# Altium PCB Glucometer-I.C.- RF Module V2.PcbDoc
Units mm, origin at the board's own origin, x right, y up, seen from the top; angles counter-clockwise.
Board outline 23.33 x 19.55 mm, 2 copper layers (Top Layer, Bottom Layer); 2 components, 14 nets, 21 pads, 0 vias.
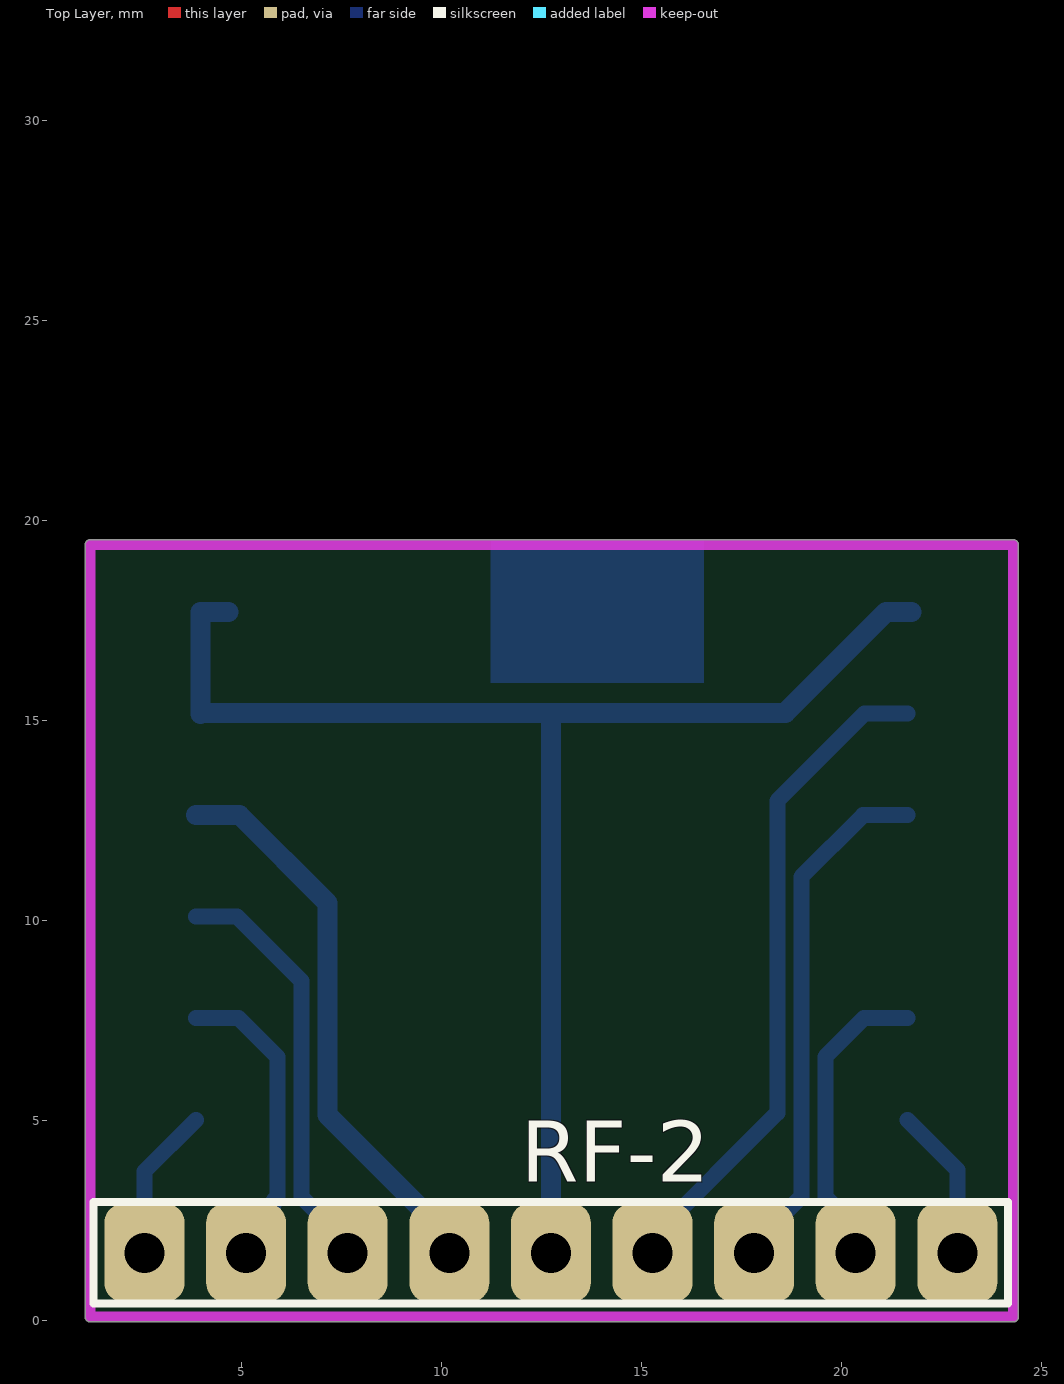
[diagram p0: Top Layer view]
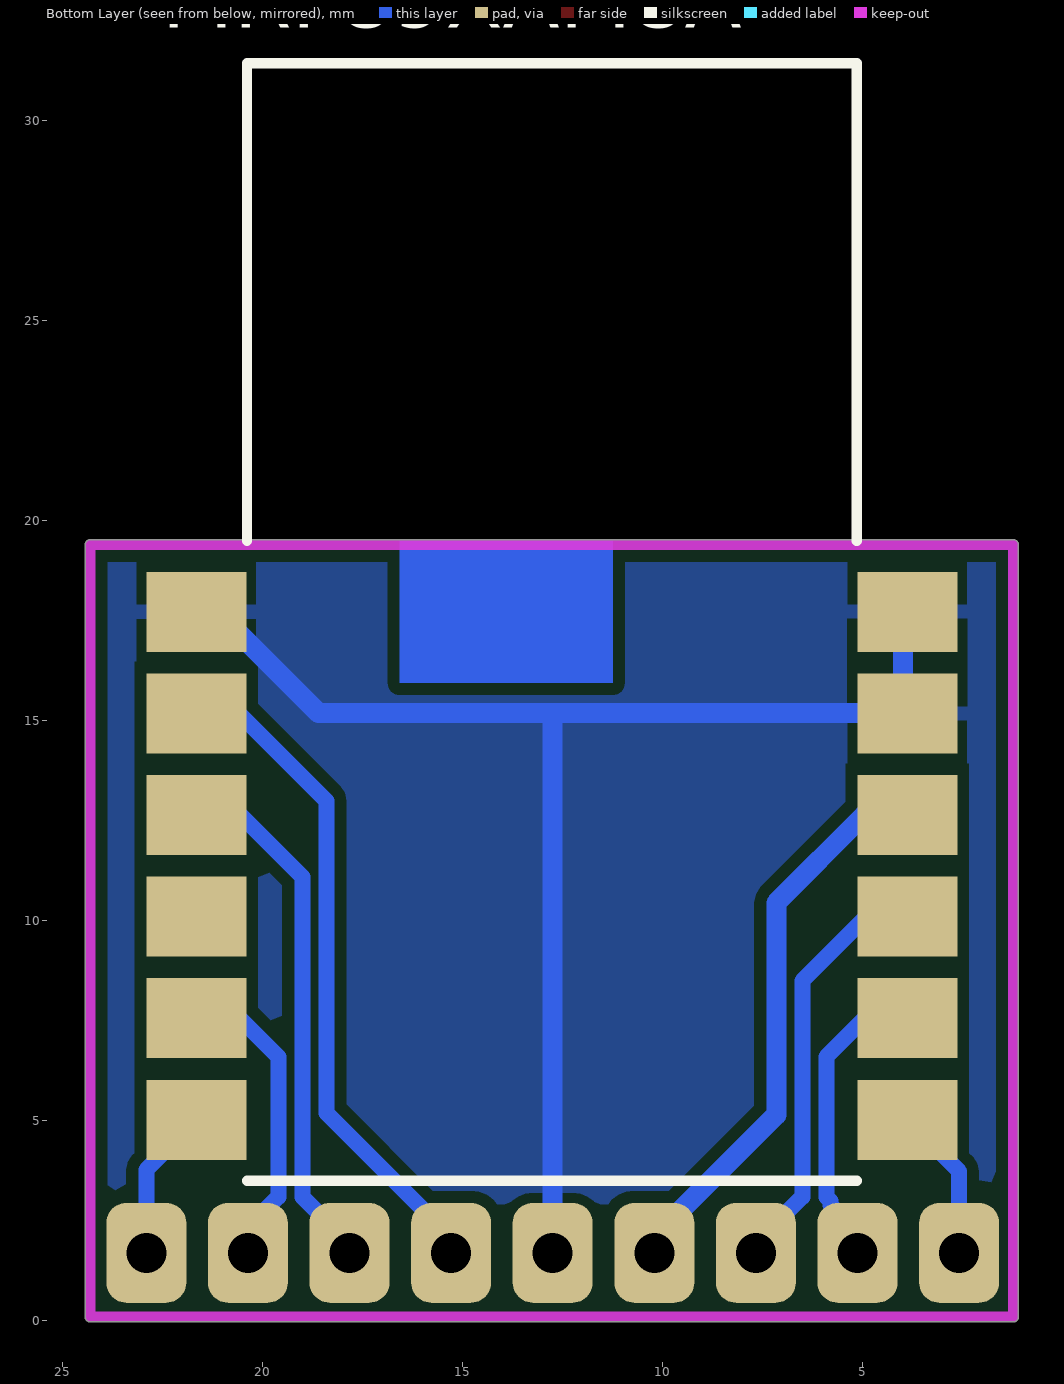
[diagram p1: Bottom Layer view, seen from below]

## Layer stack, top to bottom
Top Layer: signal copper 0.0356
Dielectric: dielectric 0.32, FR-4, Dk 4.8
Bottom Layer: signal copper 0.0356

## Board outline
1.098,0.1 ccw(c1.225,0.1) 1.225,-0.027 24.3,-0.027 ccw(c24.3,0.1) 24.427,0.1 24.427,19.4 ccw(c24.3,19.4) 24.3,19.527 1.225,19.527 ccw(c1.225,19.4) 1.098,19.4

## Design rules (kind name [scope] priority, off if disabled: settings)
Clearance [All] p1: gap=0.2
PlaneConnect [All] p1: planeconnectstyle=Relief reliefexpansion=0.508 reliefentries=4 reliefconductorwidth=0.35 reliefairgap=0.25
PolygonConnect [All] p1: connectstyle=Relief reliefconductorwidth=0.35 reliefentries=4 polygonreliefangle="90 Angle" airgapwidth=0.25
RoutingVias [All] p1: holewidth=0.711 width=1.4 viastyle="Through Hole" minholewidth=0.711 minwidth=1 maxholewidth=0.711 maxwidth=2
SolderMaskExpansion [All] p1: expansion=0.102
Width [All] p1: maxlimit=5 minlimit=0.25 preferedwidth=0.35 minimp=50.000000 maximp=50.000000 favimp=50.000000
27 further rules are at their usual default settings.

## Components (designator, comment, footprint, x,y, rotation, side; value= is the part's Value field where it differs from the comment)
MRF89XAM8A "MRF89XAM8A" MRF89XAM8A 21.65,3.5 r180 bottom
RF-2 "Header 9" HDR1X9 22.9,1.7 r180 top

## Footprints (in the part's own frame and the unit in brackets; to place one, negate y for a bottom-side part, rotate by r counter-clockwise, add the part's x,y. Pads: shape width x height; smd on the part's side, far side on the other; paste and mask are expansions set on the pad)
HDR1X9 [mm] "Connector; Header; 9 Position"
  rrect50% 2x2.5 hole 1: 1(0,0) 2(2.54,0) 3(5.08,0) 4(7.62,0) 5(10.16,0) 6(12.7,0) 7(15.24,0) 8(17.78,0) 9(20.32,0)
  silkscreen extent -1.27,-1.27 21.59,1.27
MRF89XAM8A [mm] "RF Module"
  rect 2.5x2 smd: 1(0,14.224) 2(0,11.684) 3(0,9.144) 4(0,6.604) 5(0,4.064) 6(0,1.524) 7(17.78,1.524) 8(17.78,4.064) 9(17.78,6.604) 10(17.78,9.144) 11(17.78,11.684) 12(17.78,14.224)
  Top Layer region: 5.08,16.002 10.414,16.002 10.414,12.446 5.08,12.446
  silkscreen extent 1.27,0 16.51,27.94, body extent 0,0 17.78,27.94, height 1.91

## Part data
MRF89XAM8A: "RF Module. 868MHz Ultra Low Power Sub-Ghz Transceiver Module"
RF-2: "Header, 9-Pin"

## Nets (pads, with @x,y where several pads share a name; then routed paths per layer and width w, separated by ;. In a path a pad name is that pad's centre, name@x,y a point inside that pad or via, vN(x,y) a via of type N, cw(c..) or ccw(c..) an arc to the next point about the centre after c; other vN are vias at no path point)
3.3V: 
CSCON: MRF89XAM8A.3 RF-2.3 | length 13.2
  Bottom Layer w0.4: RF-2.3 17.82,1.92 19,3.1 19,11.1 20.544,12.644 MRF89XAM8A.3
CSDATA: MRF89XAM8A.8 RF-2.8 | length 7.7
  Bottom Layer w0.4: MRF89XAM8A.8 4.936,7.564 5.9,6.6 5.9,3.1 5.8,3 5.8,2.9 5.12,2.22 RF-2.8
GND: MRF89XAM8A.1 MRF89XAM8A.11 MRF89XAM8A.12 RF-2.5 | length 35.5
  Bottom Layer w0.5: MRF89XAM8A.12@4.686,17.714 3.977,17.714 3.977,15.174 4.003,15.2 18.6,15.2 21.114,17.714 MRF89XAM8A.1@21.757,17.714 ; RF-2.5 12.74,15.14
IRQ1: MRF89XAM8A.9 RF-2.7 | length 10.6
  Bottom Layer w0.4: MRF89XAM8A.9 4.896,10.104 6.5,8.5 6.5,3.1 7.66,1.94 RF-2.7
NetCON1_3: 
NetCON1_4: 
NetCON1_8: 
NetMRF89XAM8A_4: MRF89XAM8A.4
RESET: MRF89XAM8A.2 RF-2.4 | length 16.7
  Bottom Layer w0.4: RF-2.4 15.28,2.08 18.4,5.2 18.4,13 20.584,15.184 MRF89XAM8A.2
SCK: MRF89XAM8A.6 RF-2.1 | length 3.8
  Bottom Layer w0.4: MRF89XAM8A.6 22.9,3.774 RF-2.1
SDI: MRF89XAM8A.5 RF-2.2 | length 7.7
  Bottom Layer w0.4: RF-2.2 20.36,2.34 19.6,3.1 19.6,6.6 20.564,7.564 MRF89XAM8A.5
SDO: MRF89XAM8A.7 RF-2.9 | length 3.9
  Bottom Layer w0.4: RF-2.9 2.58,3.734 MRF89XAM8A.7
VCC: MRF89XAM8A.10 RF-2.6 | length 14.2
  Bottom Layer w0.5: MRF89XAM8A.10 4.956,12.644 7.15,10.45 7.15,5.15 10.2,2.1 RF-2.6

## Polygon pours and split planes (outlines as drawn)
GND on Bottom Layer "Bottom Layer-No Net" (solid, pour order 2): 1.225,19.4 24.3,19.4 24.3,0.1 1.225,0.1

## Keep-outs
Keep-Out Layer:
  lines w0.254: 1.225,0.1 24.3,0.1 24.3,19.4 1.225,19.4 1.225,0.1

## Dimensions
24.3,19.4 to 24.3,0.1 on Top Overlay
24.3,0.1 to 1.225,0.1 on Top Overlay